# Altium PCB lab2_kochurin_buck.PcbDoc
Units mm, origin at the board's own origin, x right, y up, seen from the top; angles counter-clockwise.
Board outline 72.5 x 29 mm, 2 copper layers (Top Layer, Bottom Layer), stack 1.536 mm thick; 36 components, 20 nets, 122 pads, 276 vias.
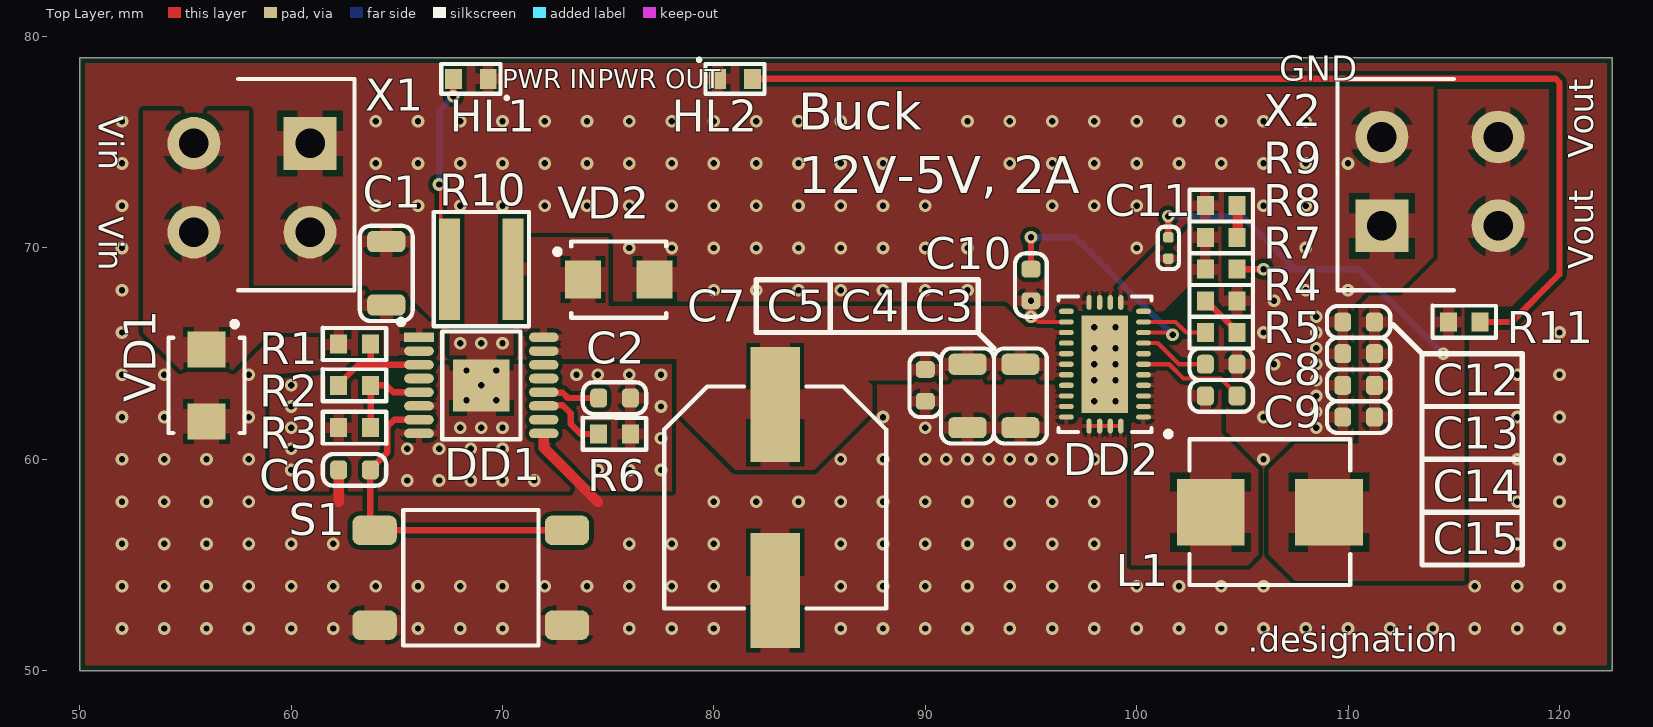
[diagram p0: Top Layer view]
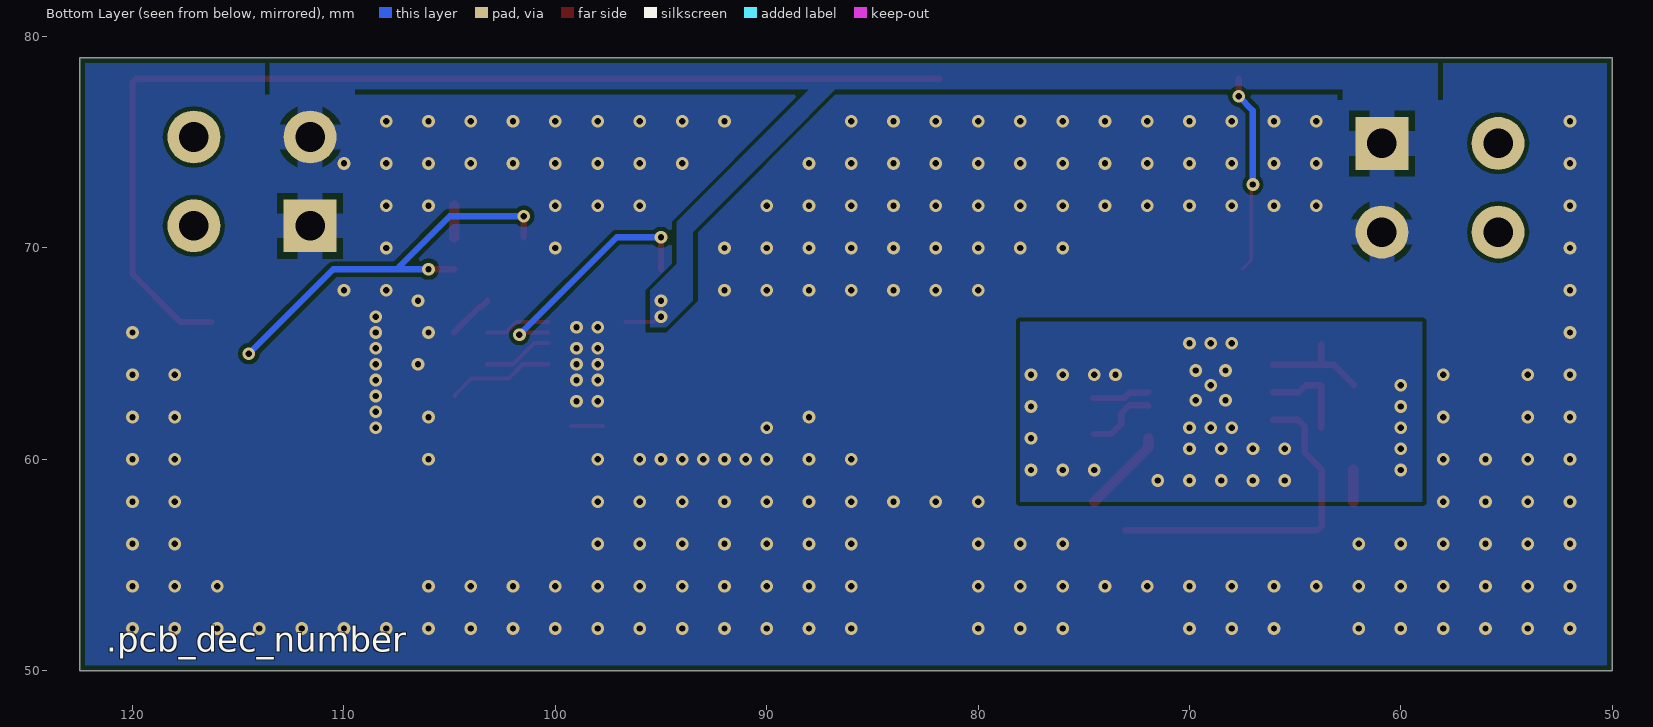
[diagram p1: Bottom Layer view, seen from below]

## Layer stack, top to bottom
Top Solder: solder mask 0.0102, Solder Resist, Dk 3.5
Top Layer: signal copper 0.018
Core 1: core 1.5, FR4, Dk 4.6
Bottom Layer: signal copper 0.018
Bottom Solder: solder mask 0.0102, Solder Resist, Dk 3.5

## Board outline
50,50 122.5,50 122.5,79 50,79

## Design rules (kind name [scope] priority, off if disabled: settings)
AcuteAngle min_acute_angle [OnCopper] p1: minimum=3.50000000000000E+0001 checktracksonly=FALSE // Минимальный угол между примитивами топологии
BoardOutlineClearance board_outline_clearance_std [NOT (OnLayer('Bottom Overlay') OR OnLayer('Top Overlay'))] p1: gap=0.25 ignorepadtopadclearanceinfootprint=FALSE except(0: Arc-SplitContinuation Track-SplitContinuation SMDPad-SplitContinuation THPad-SplitContinuation Via-SplitContinuation Fill-SplitContinuation Poly-SplitContinuation Region-SplitContinuation Text-SplitContinuation) // Отступ элементов топологии от края фрезеруемой печатной платы
Clearance clearance_outer_18um_std [OnTopLayer OR OnBottomLayer] p1: gap=0.125 ignorepadtopadclearanceinfootprint=TRUE except(0.2: Arc-Fill Arc-Poly Track-Fill Track-Poly SMDPad-SMDPad SMDPad-Fill SMDPad-Poly THPad-Fill THPad-Poly Via-Fill Via-Poly Fill-Fill Fill-Poly Poly-Poly Poly-Region Poly-Text; 0.25: Arc-Hole Track-Hole SMDPad-Hole THPad-Hole Via-Hole Fill-Hole Poly-Hole Region-Hole Text-Hole) // Зазоры на внешних слоях
Clearance clearance_inner_18um_std [NOT (OnTopLayer Or OnBottomLayer)] p2: gap=0.125 ignorepadtopadclearanceinfootprint=FALSE except(0.2: Arc-Fill Arc-Poly Track-Fill Track-Poly SMDPad-SMDPad SMDPad-Fill SMDPad-Poly THPad-Fill THPad-Poly Via-Fill Via-Poly Fill-Fill Fill-Poly Poly-Poly Poly-Region Poly-Text; 0.25: Arc-Hole Track-Hole SMDPad-Hole THPad-Hole Via-Hole Fill-Hole Poly-Hole Region-Hole Text-Hole) // Зазоры на внутренних слоях
ComponentClearance [All] p1: gap=0 collisioncheckmode=3 verticalgap=0 showdistances=FALSE
DiffPairsRouting diff_pairs_routing [All] p1: maxlimit=0.127 minlimit=0.127 mostfreqgap=0.127 toplayer_minwidth=0.143 toplayer_maxwidth=0.143 toplayer_prefwidth=0.143 bottomlayer_minwidth=0.143 bottomlayer_maxwidth=0.143 bottomlayer_prefwidth=0.143 impedanceprofiledriven=TRUE impedanceprofileid={FD46899E-B5A2-4EF5-A302-5D2DB6A51F35} maxuncoupledlength=12.7 // Правила трассировки дифференциальных пар
HoleSize min_hole_size_std [IsPad] p1: absolutevalues=TRUE maxlimit=5.9 minlimit=0.6 maxpercent=80.000 minpercent=20.000 // Диаметр межслойного переходного отверстия
HoleSize min_hole_size_via_std [IsVia] p2: absolutevalues=TRUE maxlimit=5.9 minlimit=0.3 maxpercent=80.000 minpercent=20.000 // Минимальный диаметр монтажного отверстия
HoleToHoleClearance hole_to_hole_clearance_std [All] p1: gap=0.2 allowstackedmicrovias=FALSE // Минимальное расстояние между краями двух отверстий
MinimumAnnularRing min_via_ar_std [All] p1: minimumring=0.15 // Поясок площадки переходного отверстия (Annular ring VIA)
MinimumAnnularRing min_pad_ar_std [All] p2: minimumring=0.2 // Поясок монтажной контактной площадки (Annular ring PAD)
MinimumSolderMaskSliver min_solder_mask_bridge_std [All] p1: minsoldermaskwidth=0.15 // Мнимальная ширина масочного мостика
PlaneClearance plane_clearance_18um_std [All] p1: clearance=0.2 // Отступ полигона (для слоя plane) от элементов топологии
PlaneConnect [All] p1: planeconnectstyle=Relief reliefexpansion=0.5 reliefentries=4 reliefconductorwidth=0.2 reliefairgap=0.2
PolygonConnect poly_connect_to_pad<=0.3 [(AsMM(PadXSize_AllLayers)<=0.301) or (AsMM(PadYSize_AllLayers)<=0.301)] p1: thpad.connectstyle=Relief thpad.reliefconductorwidth=0.2 thpad.reliefentries=4 thpad.polygonreliefangle="90 Angle" thpad.airgapwidth=0.2 smdpad.connectstyle=Relief smdpad.reliefconductorwidth=0.2 smdpad.reliefentries=4 smdpad.polygonreliefangle="90 Angle" smdpad.airgapwidth=0.2 via.connectstyle=Direct via.reliefconductorwidth=0.254 via.reliefentries=4 via.polygonreliefangle="90 Angle" via.airgapwidth=0.254 // Правила подключения полигонов для падов от 0,3мм и меньше
PolygonConnect poly_connect_to_pad<=0.4 [(AsMM(PadXSize_AllLayers)<=0.401) or (AsMM(PadYSize_AllLayers)<=0.401)] p2: thpad.connectstyle=Relief thpad.reliefconductorwidth=0.26 thpad.reliefentries=4 thpad.polygonreliefangle="90 Angle" thpad.airgapwidth=0.2 smdpad.connectstyle=Relief smdpad.reliefconductorwidth=0.26 smdpad.reliefentries=4 smdpad.polygonreliefangle="90 Angle" smdpad.airgapwidth=0.2 via.connectstyle=Direct via.reliefconductorwidth=0.254 via.reliefentries=4 via.polygonreliefangle="90 Angle" via.airgapwidth=0.254 // Правила подключения полигонов для падов от 0,4 и меньше
PolygonConnect poly_connect_to_pad<=0.6 [(AsMM(PadXSize_AllLayers)<=0.601) or (AsMM(PadYSize_AllLayers)<=0.601)] p3: thpad.connectstyle=Relief thpad.reliefconductorwidth=0.33 thpad.reliefentries=4 thpad.polygonreliefangle="90 Angle" thpad.airgapwidth=0.2 smdpad.connectstyle=Relief smdpad.reliefconductorwidth=0.33 smdpad.reliefentries=4 smdpad.polygonreliefangle="90 Angle" smdpad.airgapwidth=0.2 via.connectstyle=Direct via.reliefconductorwidth=0.254 via.reliefentries=4 via.polygonreliefangle="90 Angle" via.airgapwidth=0.254 // Правила подключения полигонов для падов от 0,6мм и меньше
PolygonConnect poly_connect_to_pad<=0.7 [(AsMM(PadXSize_AllLayers)<=0.701) or (AsMM(PadYSize_AllLayers)<=0.701)] p4: thpad.connectstyle=Relief thpad.reliefconductorwidth=0.46 thpad.reliefentries=4 thpad.polygonreliefangle="90 Angle" thpad.airgapwidth=0.2 smdpad.connectstyle=Relief smdpad.reliefconductorwidth=0.46 smdpad.reliefentries=4 smdpad.polygonreliefangle="90 Angle" smdpad.airgapwidth=0.2 via.connectstyle=Direct via.reliefconductorwidth=0.254 via.reliefentries=4 via.polygonreliefangle="90 Angle" via.airgapwidth=0.254 // Правила подключения полигонов для падов от 0,7мм и меньше
PolygonConnect poly_connect_to_pad<=0.8 [(AsMM(PadXSize_AllLayers)<=0.8)or(AsMM(PadYSize_AllLayers)<=0.8)] p5: thpad.connectstyle=Relief thpad.reliefconductorwidth=0.53 thpad.reliefentries=4 thpad.polygonreliefangle="90 Angle" thpad.airgapwidth=0.3 smdpad.connectstyle=Relief smdpad.reliefconductorwidth=0.53 smdpad.reliefentries=4 smdpad.polygonreliefangle="90 Angle" smdpad.airgapwidth=0.2 via.connectstyle=Direct via.reliefconductorwidth=0.254 via.reliefentries=4 via.polygonreliefangle="90 Angle" via.airgapwidth=0.254 // Правила подключения полигонов для падов от 0,8мм и меньше
PolygonConnect poly_connect_to_pad<=1 [(AsMM(PadXSize_AllLayers)<=1.01)or(AsMM(PadYSize_AllLayers)<=1.01)] p6: thpad.connectstyle=Relief thpad.reliefconductorwidth=0.6 thpad.reliefentries=4 thpad.polygonreliefangle="90 Angle" thpad.airgapwidth=0.3 smdpad.connectstyle=Relief smdpad.reliefconductorwidth=0.6 smdpad.reliefentries=4 smdpad.polygonreliefangle="90 Angle" smdpad.airgapwidth=0.2 via.connectstyle=Direct via.reliefconductorwidth=0.254 via.reliefentries=4 via.polygonreliefangle="90 Angle" via.airgapwidth=0.254 // Правила подключения полигонов для падов от 1мм и меньше
PolygonConnect poly_connect_to_pad<=1.3 [(AsMM(PadXSize_AllLayers)<=1.31)or(AsMM(PadYSize_AllLayers)<=1.31)] p7: thpad.connectstyle=Relief thpad.reliefconductorwidth=0.66 thpad.reliefentries=4 thpad.polygonreliefangle="90 Angle" thpad.airgapwidth=0.3 smdpad.connectstyle=Relief smdpad.reliefconductorwidth=0.86 smdpad.reliefentries=4 smdpad.polygonreliefangle="90 Angle" smdpad.airgapwidth=0.2 via.connectstyle=Direct via.reliefconductorwidth=0.254 via.reliefentries=4 via.polygonreliefangle="90 Angle" via.airgapwidth=0.254 // Правила подключения полигонов для падов от 1,3мм и меньше
PolygonConnect poly_connect_to_pad<=1.6 [(AsMM(PadXSize_AllLayers)<=1.61)or(AsMM(PadYSize_AllLayers)<=1.61)] p8: thpad.connectstyle=Relief thpad.reliefconductorwidth=0.8 thpad.reliefentries=4 thpad.polygonreliefangle="90 Angle" thpad.airgapwidth=0.3 smdpad.connectstyle=Relief smdpad.reliefconductorwidth=1 smdpad.reliefentries=4 smdpad.polygonreliefangle="90 Angle" smdpad.airgapwidth=0.2 via.connectstyle=Direct via.reliefconductorwidth=0.254 via.reliefentries=4 via.polygonreliefangle="90 Angle" via.airgapwidth=0.254 // Правила подключения полигонов для падов от 1,6мм и меньше
PolygonConnect poly_connect_to_pad<=1.8 [(AsMM(PadXSize_AllLayers)<=1.8)or(AsMM(PadYSize_AllLayers)<=1.8)] p9: thpad.connectstyle=Relief thpad.reliefconductorwidth=1 thpad.reliefentries=4 thpad.polygonreliefangle="90 Angle" thpad.airgapwidth=0.3 smdpad.connectstyle=Relief smdpad.reliefconductorwidth=1.2 smdpad.reliefentries=4 smdpad.polygonreliefangle="90 Angle" smdpad.airgapwidth=0.2 via.connectstyle=Direct via.reliefconductorwidth=0.254 via.reliefentries=4 via.polygonreliefangle="90 Angle" via.airgapwidth=0.254 // Правила подключения полигонов для падов от 1,8мм и меньше
PolygonConnect poly_connect_to_pad<=2 [(AsMM(PadXSize_AllLayers)<=2.01)or(AsMM(PadYSize_AllLayers)<=2.01)] p10: thpad.connectstyle=Relief thpad.reliefconductorwidth=1.1 thpad.reliefentries=4 thpad.polygonreliefangle="90 Angle" thpad.airgapwidth=0.3 smdpad.connectstyle=Relief smdpad.reliefconductorwidth=1.4 smdpad.reliefentries=4 smdpad.polygonreliefangle="90 Angle" smdpad.airgapwidth=0.2 via.connectstyle=Direct via.reliefconductorwidth=0.254 via.reliefentries=4 via.polygonreliefangle="90 Angle" via.airgapwidth=0.254 // Правила подключения полигонов для падов от 2мм и меньше
PolygonConnect poly_connect_to_pad<=2.3 [(AsMM(PadXSize_AllLayers)<=2.31)or(AsMM(PadYSize_AllLayers)<=2.31)] p11: thpad.connectstyle=Relief thpad.reliefconductorwidth=1.2 thpad.reliefentries=4 thpad.polygonreliefangle="90 Angle" thpad.airgapwidth=0.3 smdpad.connectstyle=Relief smdpad.reliefconductorwidth=1.4 smdpad.reliefentries=4 smdpad.polygonreliefangle="90 Angle" smdpad.airgapwidth=0.2 via.connectstyle=Direct via.reliefconductorwidth=0.254 via.reliefentries=4 via.polygonreliefangle="90 Angle" via.airgapwidth=0.254 // Правила подключения полигонов для падов от 2,3мм и меньше
PolygonConnect poly_connect_to_pad<=2.5 [(AsMM(PadXSize_AllLayers)<=2.51)or(AsMM(PadYSize_AllLayers)<=2.51)] p12: thpad.connectstyle=Relief thpad.reliefconductorwidth=1.2 thpad.reliefentries=4 thpad.polygonreliefangle="90 Angle" thpad.airgapwidth=0.3 smdpad.connectstyle=Relief smdpad.reliefconductorwidth=1.4 smdpad.reliefentries=4 smdpad.polygonreliefangle="90 Angle" smdpad.airgapwidth=0.2 via.connectstyle=Direct via.reliefconductorwidth=0.254 via.reliefentries=4 via.polygonreliefangle="90 Angle" via.airgapwidth=0.254 // Правила подключения полигонов для падов от 2,5мм и меньше
PolygonConnect poly_connect_to_pad<=2.7 [(AsMM(PadXSize_AllLayers)<=2.71)or(AsMM(PadYSize_AllLayers)<=2.71)] p13: thpad.connectstyle=Relief thpad.reliefconductorwidth=1.4 thpad.reliefentries=4 thpad.polygonreliefangle="90 Angle" thpad.airgapwidth=0.3 smdpad.connectstyle=Relief smdpad.reliefconductorwidth=1.6 smdpad.reliefentries=4 smdpad.polygonreliefangle="90 Angle" smdpad.airgapwidth=0.2 via.connectstyle=Direct via.reliefconductorwidth=0.254 via.reliefentries=4 via.polygonreliefangle="90 Angle" via.airgapwidth=0.254 // Правила подключения полигонов для падов от 2,7мм и меньше
PolygonConnect poly_connect_to_pad<=3 [(AsMM(PadXSize_AllLayers)<=3.01)or(AsMM(PadYSize_AllLayers)<=3.01)] p14: thpad.connectstyle=Relief thpad.reliefconductorwidth=1.6 thpad.reliefentries=4 thpad.polygonreliefangle="90 Angle" thpad.airgapwidth=0.3 smdpad.connectstyle=Relief smdpad.reliefconductorwidth=1.8 smdpad.reliefentries=4 smdpad.polygonreliefangle="90 Angle" smdpad.airgapwidth=0.2 via.connectstyle=Direct via.reliefconductorwidth=0.254 via.reliefentries=4 via.polygonreliefangle="90 Angle" via.airgapwidth=0.254 // Правила подключения полигонов для падов от 3мм и меньше
PolygonConnect poly_connect_to_pad<=7 [(AsMM(PadXSize_AllLayers)<7.01)or(AsMM(PadYSize_AllLayers)<=7.01)] p15: thpad.connectstyle=Relief thpad.reliefconductorwidth=2 thpad.reliefentries=4 thpad.polygonreliefangle="90 Angle" thpad.airgapwidth=0.4 smdpad.connectstyle=Relief smdpad.reliefconductorwidth=2 smdpad.reliefentries=4 smdpad.polygonreliefangle="90 Angle" smdpad.airgapwidth=0.3 via.connectstyle=Direct via.reliefconductorwidth=0.254 via.reliefentries=4 via.polygonreliefangle="90 Angle" via.airgapwidth=0.254 // Правила подключения полигонов для падов от 7мм и меньше
PolygonConnect poly_connect_to_pad [All] p16: thpad.connectstyle=Relief thpad.reliefconductorwidth=0.25 thpad.reliefentries=4 thpad.polygonreliefangle="90 Angle" thpad.airgapwidth=0.2 smdpad.connectstyle=Relief smdpad.reliefconductorwidth=0.25 smdpad.reliefentries=4 smdpad.polygonreliefangle="90 Angle" smdpad.airgapwidth=0.2 via.connectstyle=Direct via.reliefconductorwidth=0.25 via.reliefentries=4 via.polygonreliefangle="90 Angle" via.airgapwidth=0.2 // Правила подключения полигонов общие
RoutingCorners [All] p1 off: cornerstyle=45-Degree minsetback=2.5 maxsetback=2.5
RoutingVias [All] p1: holewidth=0.3 width=0.6 viastyle="Through Hole" minholewidth=0.3 minwidth=0.6 maxholewidth=5.9 maxwidth=6.4
SilkToSilkClearance silk_to_silk_clearance_std [All] p1 off: silktosilkclearance=0.15 // Отступ текста шелкографии от других примитивов шелкографии
SilkToSolderMaskClearance silk_to_solder_mask_clearance_std [IsPad] p1 off: minsilkscreentomaskgap=0.15 clearancetoexposedcopper=FALSE // Минимальное расстояние между элементами шелкографии и вскрытой медью
SolderMaskExpansion solder_mask_expansion_std [All] p1: expansion=0.05 // Припуск паяльной масски
UnRoutedNet [All] p1: checkbadconnections=TRUE
Width width_18um_std [All] p1: maxlimit=10 minlimit=0.125 preferedwidth=0.15 checkconnectedcopper=TRUE // Ширина проводников (общая)
19 further rules are at their usual default settings.

## Components (designator, comment, footprint, x,y, rotation, side; value= is the part's Value field where it differs from the comment)
C1 "1 мк" C1206 64.5,68.8 r90 top
C2 "82" C0603 75.3,62.9 r0 top
C3 "2,2 мк" C1206 94.5,63 r270 top
C4 "2,2 мк" C1206 92,63 r270 top
C5 "0,1 мк" C0603 90,63.5 r270 top
C6 "0,1 мк" C0603 63,59.5 r180 top
C7 "47 мк" CAPAE-1000X1000X1200 82.9,58.2 r270 top
C8 "2,2 мк" C0603 104,64.5 r0 top
C9 "0,47 мк" C0603 104,63 r0 top
C10 "1 мк" C0603 95,68.25 r270 top
C11 "27 п" C0402 101.5,70 r270 top
C12 "47 мк" C0603 110.5,66.5 r0 top
C13 "47 мк" C0603 110.5,65 r0 top
C14 "47 мк" C0603 110.5,63.5 r0 top
C15 "47 мк" C0603 110.5,62 r0 top
DD1 "TPS26600PWPR" HTSSOP-16 69,63.5 r0 top
DD2 "LM76002QRNPRQ1" WQFN-30 98.5,64.5 r180 top
HL1 "TLMG1100-GS08" HL0603 68.5,78 r180 top
HL2 "TLMS1000-GS08" HL0603 81,78 r0 top
L1 "SRP7028A-220M" SRP-2-670X660X280 106.3,57.5 r0 top
R1 "523 к" R0603 63,65.45 r180 top
R2 "26,7 к" R0603 63,63.5 r180 top
R3 "44,2 к" R0603 63,61.5 r0 top
R4 "4,42 к" R0603 104,67.5 r180 top
R5 "130 к" R0603 104,66 r180 top
R6 "6,04 к" R0603 75.3,61.2 r180 top
R7 "100 к" R0603 104,69 r0 top
R8 "24 к" R0603 104,70.5 r180 top
R9 "1 к" R0603 104,72 r0 top
R10 "1 к" R1218 69,69 r0 top
R11 "220" R0603 115.5,66.5 r180 top
S1 "FSM4JSMA" FSM4JSMA 68.5,54.4 r0 top
VD1 "1.5SMC62CA" DO-214AB 56,63.5 r270 top
VD2 "SL13-E3/5AT" DO-214AC 75.5,68.5 r0 top
X1 "4-1775099-0" 4-1775099-0 57.5,73 r270 top
X2 "4-1775099-0" 4-1775099-0 115,73 r90 top

## Footprints (in the part's own frame and the unit in brackets; to place one, negate y for a bottom-side part, rotate by r counter-clockwise, add the part's x,y. Pads: shape width x height; smd on the part's side, far side on the other; paste and mask are expansions set on the pad)
4-1775099-0 [mm]
  rect 2.5x2.5 hole 1.4: 1(-1.95,3.4)
  round 2.5 hole 1.4: 2(2.25,3.4) 3(-1.95,-2.1) 4(2.25,-2.1)
  silkscreen extent -5,0 5,5.5, body extent -4.95,-5.45 4.9,5.45, height 12.8
C0402 [mm] "Chip Capacitor, 2-Leads, Body 1,00x0,50mm, IPC Medium Density"
  rrect50% 0.5x0.5 smd: 1(-0.5,0) 2(0.5,0)
  silkscreen extent -1,-0.5 1,0.5, body extent -0.5,-0.25 0.5,0.25, height 0.5
C0603 [mm] "Chip Capacitor, 2-Leads, Body 1,60x0,80mm, IPC Medium Density"
  rrect50% 0.8x0.9 smd: 1(-0.75,0) 2(0.75,0)
  silkscreen extent -1.5,-0.75 1.5,0.75, body extent -0.8,-0.4 0.8,0.4, height 0.8
C1206 [mm] "Chip Capacitor, 2-Leads, Body 3,20x1,60mm, IPC Medium Density"
  rrect50% 1x1.8 smd: 1(-1.5,0) 2(1.5,0)
  silkscreen extent -2.25,-1.25 2.25,1.25, body extent -1.6,-0.8 1.6,0.8, height 0.78
CAPAE-1000X1000X1200 [mm] "Aluminum Electrolytic Capacitor, Body 10,50x10,50x12,50mm, IPC Low Density"
  rect 5.45x2.35 smd: 1(-4.4,0) 2(4.4,0)
  silkscreen extent -5.25,-5.25 5.25,5.25, body extent -6.05,-5.25 6.05,5.25, height 12.5
DO-214AB [mm] "Molded Diode, 2-Leads, Body 6,86x5,91mm, IPC Medium Density"
  rect 1.7x1.8 smd: 1(-1.7,0) 2(1.7,0)
  silkscreen extent -3.02,-1.8 2.25,1.8, body extent -2.7,-1.81 2.7,1.81, height 2.43
DO-214AC [mm] "Molded Diode, 2-Leads, Body 4,25x2,67mm, IPC Medium Density"
  rect 1.7x1.8 smd: 1(-1.7,0) 2(1.7,0)
  silkscreen extent -3.02,-1.8 2.25,1.8, body extent -2.7,-1.81 2.7,1.81, height 2.43
FSM4JSMA [mm]
  rrect50% 2.1x1.4 smd: 1(-4.55,2.24) 1(4.55,2.24) 2(-4.55,-2.24) 2(4.55,-2.24)
  silkscreen extent -3.2,-3.2 3.2,3.2, body extent -5,-3 5,3, height 5.13
HL0603 [mm] "Chip Diode, 2-Leads, Body 1,60x0,80mm, IPC Medium Density"
  rect 0.8x0.95 smd: 1(-0.825,0) 2(0.825,0)
  silkscreen extent -1.75,-0.7 1.4,0.95, body extent -0.81,-0.4 0.81,0.4, height 0.6
HTSSOP-16 [mm] "TSOP, 16-Leads, Body 5,00x4,40mm, Pitch 0,65mm, Thermal Pad 2,46x2,66mm, IPC Medium Density"
  rect 2.66x2.46 smd: 0(0,0)
  rect 1.4x0.45 smd: 1(-2.95,2.275)
  oval 1.4x0.45 smd: 2(-2.95,1.625) 3(-2.95,0.975) 4(-2.95,0.325) 5(-2.95,-0.325) 6(-2.95,-0.975) 7(-2.95,-1.625) 8(-2.95,-2.275) 9(2.95,-2.275) 10(2.95,-1.625) 11(2.95,-0.975) 12(2.95,-0.325) 13(2.95,0.325) 14(2.95,0.975) 15(2.95,1.625) 16(2.95,2.275)
  silkscreen extent -3.92,-2.55 1.85,3.12, body extent -3.2,-2.5 3.2,2.5, height 1.2
R0603 [mm] "Chip Resistor, 2-Leads, Body 1,60x0,80mm, IPC Medium Density"
  rect 0.8x0.9 smd: 1(-0.75,0) 2(0.75,0)
  silkscreen extent -1.5,-0.77 1.5,0.75, body extent -0.77,-0.43 0.78,0.43, height 0.43
R1218 [mm] "Chip Resistor, 2-Leads, Body 4,60x3,10mm, IPC Medium Density"
  rect 1x4.8 smd: 1(-1.5,0) 2(1.5,0)
  silkscreen extent -2.25,-2.7 2.25,2.7, body extent -1.6,-2.3 1.6,2.31, height 0.55
SRP-2-670X660X280 [mm] "Precision Wire Wound Inductor, 2-Leads, Body 7,30x6,60mm, IPC Medium Density"
  rect 3.2x3.15 smd: 1(-2.8,0) 2(2.8,0)
  silkscreen extent -3.8,-3.45 3.8,3.45, body extent -3.7,-3.3 3.7,3.3, height 3
WQFN-30 [mm] "QFN, 30-Leads, Body 4,00x6,00mm, Pitch 0,50mm, Thermal Pad 2,20x4,60mm, IPC Medium Density"
  rect 2.2x4.6 smd: 0(0,0)
  oval 0.7x0.25 smd: 1(-1.825,2.5) 2(-1.825,2) 3(-1.825,1.5) 4(-1.825,1) 5(-1.825,0.5) 6(-1.825,0) 7(-1.825,-0.5) 8(-1.825,-1) 9(-1.825,-1.5) 10(-1.825,-2) 11(-1.825,-2.5) 16(1.825,-2.5) 17(1.825,-2) 18(1.825,-1.5) 19(1.825,-1) 20(1.825,-0.5) 21(1.825,0) 22(1.825,0.5) 23(1.825,1) 24(1.825,1.5) 25(1.825,2) 26(1.825,2.5)
  oval 0.25x0.7 smd: 12(-0.75,-2.925) 13(-0.25,-2.925) 14(0.25,-2.925) 15(0.75,-2.925) 27(0.75,2.925) 28(0.25,2.925) 29(-0.25,2.925) 30(-0.75,2.925)
  silkscreen extent -3.13,-3.2 2.2,3.42, body extent -2,-3 2,3, height 0.8

## Part data
C1: library part c0066, "=Описание", HelpURL=https://www.yageo.com/upload/media/product/productsearch/datasheet/mlcc/UPY-NP0X7R_MV_100-to-630V_22.pdf, ID=c0066, Корпус=1206, Наименование=CC1206KKX7R0BB105, Напряжение="100 В", Номинал="1 мк", Номинальное напряжение="100 В", Описание="Конденсатор чип 1206 1 мкФ 100 В ±10 %", Отклонение="±10 %", Производитель="YAGEO Corp.", Рабочие температуры="от –55 °С до +125 °С", Температурный коэффициент емкости=X7R, Фамилия=Ларионов
C2: library part c0011, "=Описание", HelpURL=https://www.yageo.com/upload/media/product/productsearch/datasheet/mlcc/UPY-GP_NP0_16V-to-50V_18.pdf, ID=c0011, Корпус=0603, Наименование=CC0603JRNPO7BN820, Напряжение="16 В", Номинал=82, Номинальное напряжение="16 В", Описание="Конденсатор чип 0603 82 пФ 16 В ±5 %", Отклонение="±5 %", Производитель="YAGEO Corp.", Рабочие температуры="от –55 °С до +125 °С", Температурный коэффициент емкости=C0G, Фамилия=Ларионов
C3 C4: library part c0076, "=Описание", HelpURL=https://www.yageo.com/upload/media/product/productsearch/datasheet/mlcc/UPY-NP0X7R_MV_100-to-630V_22.pdf, ID=c0076, Корпус=1206, Наименование=CC1206KKX7R0BB225, Напряжение="100 В", Номинал="2,2 мк", Номинальное напряжение="100 В", Описание="Конденсатор чип 1206 2,2 мкФ 100 В ±10 %", Отклонение="±10 %", Производитель="YAGEO Corp.", Рабочие температуры="от –55 °С до +125 °С", Температурный коэффициент емкости=X7R, Фамилия=Ларионов
C5 C6: library part c0036, "=Описание", HelpURL=https://www.yageo.com/upload/media/product/productsearch/datasheet/mlcc/UPY-NP0X7R_MV_100-to-630V_22.pdf, ID=c0036, Корпус=0603, Наименование=CC0603KRX7R0BB104, Напряжение="100 В", Номинал="0,1 мк", Номинальное напряжение="100 В", Описание="Конденсатор чип 0603 100 нФ 100 В ±10 %", Отклонение="±10 %", Производитель="YAGEO Corp.", Рабочие температуры="от –55 °С до +125 °С", Температурный коэффициент емкости=X7R, Фамилия=Ларионов
C7: library part c0118, "=Описание", HelpURL=https://www.vishay.com/capacitors/list/product-28403/, ID=c0118, Корпус="CAPAE (10 x 10 x 12)", Наименование=MAL214699904E3, Напряжение="100 В", Номинал="47 мк", Номинальное напряжение="100 В", Описание="Конденсатор электролитический 47 мкФ 100 В ±20 %", Отклонение="±20 %", Производитель="Vishay Intertechnology, Inc.", Рабочие температуры="от –55 °С до +125 °С", Температурный коэффициент емкости=-, Фамилия=Ларионов
C8: library part c0025, "=Описание", HelpURL=https://www.yageo.com/upload/media/product/productsearch/datasheet/mlcc/UPY-GPHC_X7R_6.3V-to-50V_20.pdf, ID=c0025, Корпус=0603, Наименование=CC0603KRX7R6BB225, Напряжение="10 В", Номинал="2,2 мк", Номинальное напряжение="10 В", Описание="Конденсатор чип 0603 2,2 мкФ 10 В ±10 %", Отклонение="±10 %", Производитель="YAGEO Corp.", Рабочие температуры="от -55 °С до +125 °С", Фамилия=Чернов
C9: library part c0007, "=Описание", HelpURL=http://product.samsungsem.com/mlcc/CL10B474KO8VPN.do, ID=c0007, Корпус=0603, Наименование=CL10B474KO8VPNC, Напряжение="16 В", Номинал="0,47 мк", Номинальное напряжение="16 В", Описание="Конденсатор чип 0603 0,47 мкФ 16 В ±10 %", Отклонение="±10 %", Производитель="Samsung electro-mechanics", Рабочие температуры="от -55 °С до +125 °С", Фамилия=Водорезов
C10: library part c0022, "=Описание", HelpURL=https://www.yageo.com/upload/media/product/products/datasheet/mlcc/UPY-GPHC_X7R_6.3V-to-50V_20.pdf, ID=c0022, Корпус=0603, Наименование=CC0603KRX7R8BB105, Напряжение="25 В", Номинал="1 мк", Номинальное напряжение="25 В", Описание="Конденсатор чип 0603 1 мкФ 25 В ±10 %", Отклонение="±10 %", Производитель="YAGEO Corp.", Рабочие температуры="от -55 °С до +125 °С", Фамилия=Ларионов
C11: library part c0001, "=Описание", HelpURL=http://product.samsungsem.com/mlcc/CL05C270JB5NNN.do, ID=c0001, Корпус=0402, Наименование=CL05C270JB5NNNC, Напряжение="50 В", Номинал="27 п", Номинальное напряжение="50 В", Описание="Конденсатор чип 0402 27 пФ 50 В ±5 %", Отклонение="±5 %", Производитель="Samsung electro-mechanics", Рабочие температуры="от -55 °С до +125 °С", Фамилия=Соколов
C12 C13 C14 C15: library part c0035, "=Описание", HelpURL=https://www.yageo.com/upload/media/product/productsearch/datasheet/mlcc/UPY-GPHC_X5R_4V-to-50V_26.pdf, ID=c0035, Корпус=0603, Наименование=CC0603MRX5R5BB476, Напряжение="6,3 В", Номинал="47 мк", Номинальное напряжение="6,3 В", Описание="Конденсатор чип 0603 47 мкФ 6,3 В ±20 %", Отклонение="±20 %", Производитель="YAGEO Corp.", Рабочие температуры="от -55 °С до +85 °С", Фамилия=Жернаков
DD1: library part dd0001, "=Описание", HelpURL=https://www.ti.com/product/TPS2660, ID=dd0001, Корпус=HTSSOP-16, Максимальное напряжение="62 В", Наименование=TPS26600PWPR, Напряжение="от 4,2 В до 60 В", Описание="Защитная микросхема eFuse 60 В и 2 А", Производитель="Texas Instruments", Рабочие температуры="от -40 °С до +125 °С", Ток="от 0,1 А до 2,23 А", Фамилия=Ларионов
DD2: library part dd0007, "=Описание", HelpURL=https://www.ti.com/product/LM76002-Q1, ID=dd0007, Входное напряжение="от 3,5 В до 60 В", Выходное напряжение="от 1 В до 57 В", Коммутируемый ток="от 0 А до 2,5 А", Корпус=WQFN-30, Наименование=LM76002QRNPRQ1, Описание="Понижающий преобразователь напряжения 60 В и 2,5 А", Производитель="Texas Instruments", Рабочие температуры="от -40 °С до +125 °С", Фамилия=Кочурин, Частота переключения="от 300 кГц до 2,2 МГц"
HL1: library part hl0005, "=Описание", HelpURL=https://www.vishay.com/leds/list/product-83173/, ID=hl0005, Корпус=0603, Наименование=TLMG1100-GS08, Номинальная длина волны="570 нм", Номинальная сила света="35 мкд", Номинальное падение напряжения="2,1 В", Номинальный прямой ток="30 мА", Описание="Светодиод чип 0603 зеленый", Производитель="Vishay Intertechnology, Inc.", Рабочие температуры="от -40 °С до +100 °С", Рассеиваемая мощность="90 мВт", Фамилия=Ларионов, Цвет=Green
HL2: library part hl0001, "=Описание", HelpURL=https://www.vishay.com/leds/list/product-83172/, ID=hl0001, Корпус=0603, Наименование=TLMS1000-GS08, Номинальная длина волны="628 нм", Номинальная сила света="4 мкд", Номинальное падение напряжения="1,8 В", Номинальный прямой ток="15 мА", Описание="Светодиод чип 0603 красный", Производитель="Vishay Intertechnology, Inc.", Рабочие температуры="от -40 °С до +100 °С", Рассеиваемая мощность="40 мВт", Фамилия=Ларионов, Цвет=Red
L1: library part l0006, "=Описание", HelpURL=https://www.bourns.com/products/magnetic-products/power-inductors-aec-q200-compliant/product/SRP7028A, ID=l0006, Индуктивность="22 мкГн", Корпус="6,7 x 6,6 x 2,8", Максимальное активное сопротивление="190 мОм", Наименование=SRP7028A-220M, Номинал="22 мкГн", Номинальное активное сопротивление="165 мОм", Номинальный ток (при нагреве на 20 °С/40 °С)="2 А", Описание="Катушка индуктивности 22 мкГн ±20 %", Отклонение="±20 %", Производитель="Bourns, Inc.", Рабочее напряжение="не указано", Рабочие температуры="от –55 °С до +150 °С", Резонансная частота="10 МГц", Ток насыщения="3,5 А", Фамилия=Ларионов
R1: library part r0119, "=Описание", HelpURL=https://www.yageo.com/upload/media/product/productsearch/datasheet/rchip/PYu-RC_Group_51_RoHS_L_11.pdf, ID=r0119, Корпус=0603, Наименование=RC0603FR-07523KL, Номинал="523 к", Номинальное напряжение="75 В", Номинальный ток="1 А", Описание="Резистор чип 0603 523 кОм ±1 % 0,1 Вт", Отклонение="±1 %", Производитель="YAGEO Corp.", Рабочие температуры="от –55 °С до +155 °С", Фамилия=Жернаков
R2: library part r0022, "=Описание", HelpURL=https://www.yageo.com/upload/media/product/productsearch/datasheet/rchip/PYu-RC_Group_51_RoHS_L_11.pdf, ID=r0022, Корпус=0603, Наименование=RC0603FR-0726K7L, Номинал="26,7 к", Номинальное напряжение="75 В", Номинальный ток="1 А", Описание="Резистор чип 0603 26,7 кОм ±1 % 0,1 Вт", Отклонение="±1 %", Производитель="YAGEO Corp.", Рабочие температуры="от -55 °С до +155 °С", Фамилия=Ларионов
R3: library part r0023, "=Описание", HelpURL=https://www.yageo.com/upload/media/product/productsearch/datasheet/rchip/PYu-RC_Group_51_RoHS_L_11.pdf, ID=r0023, Корпус=0603, Наименование=RC0603FR-0744K2L, Номинал="44,2 к", Номинальное напряжение="75 В", Номинальный ток="1 А", Описание="Резистор чип 0603 44,2 кОм ±1 % 0,1 Вт", Отклонение="±1 %", Производитель="YAGEO Corp.", Рабочие температуры="от -55 °С до +155 °С", Фамилия=Ларионов
R4: library part r0028, "=Описание", HelpURL=https://www.yageo.com/upload/media/product/productsearch/datasheet/rchip/PYu-RC_Group_51_RoHS_L_11.pdf, ID=r0028, Корпус=0603, Наименование=RC0603FR-074K42L, Номинал="4,42 к", Номинальное напряжение="75 В", Номинальный ток="1 А", Описание="Резистор чип 0603 4,42 кОм ±1 % 0,1 Вт", Отклонение="±1 %", Производитель="YAGEO Corp.", Рабочие температуры="от -55 °С до +155 °С", Фамилия=Жернаков
R5: library part r0077, "=Описание", HelpURL=https://www.yageo.com/upload/media/product/productsearch/datasheet/rchip/PYu-RC_Group_51_RoHS_L_11.pdf, ID=r0077, Корпус=0603, Наименование=RC0603FR-07130KL, Номинал="130 к", Номинальное напряжение="75 В", Номинальный ток="1 А", Описание="Резистор чип 0603 130 кОм ±1 % 0,1 Вт", Отклонение="±1 %", Производитель="YAGEO Corp.", Рабочие температуры="от -55 °С до +155 °С", Фамилия=Паньков
R6: library part r0015, "=Описание", HelpURL=https://www.yageo.com/upload/media/product/productsearch/datasheet/rchip/PYu-RC_Group_51_RoHS_L_11.pdf, ID=r0015, Корпус=0603, Наименование=RC0603FR-076K04L, Номинал="6,04 к", Номинальное напряжение="75 В", Номинальный ток="1 А", Описание="Резистор чип 0603 6,04 кОм ±1 % 0,1 Вт", Отклонение="±1 %", Производитель="YAGEO Corp.", Рабочие температуры="от -55 °С до +155 °С", Фамилия=Ларионов
R7: library part r0073, "=Описание", HelpURL=https://www.yageo.com/upload/media/product/productsearch/datasheet/rchip/PYu-RC_Group_51_RoHS_L_11.pdf, ID=r0073, Корпус=0603, Наименование=RC0603FR-07100KL, Номинал="100 к", Номинальное напряжение="75 В", Номинальный ток="1 А", Описание="Резистор чип 0603 100 кОм ±1 % 0,1 Вт", Отклонение="±1 %", Производитель="YAGEO Corp.", Рабочие температуры="от -55 °С до +155 °С", Фамилия=Водорезов
R8: library part r0052, "=Описание", HelpURL=https://www.yageo.com/upload/media/product/productsearch/datasheet/rchip/PYu-RC_Group_51_RoHS_L_11.pdf, ID=r0052, Корпус=0603, Наименование=RC0603FR-0724KL, Номинал="24 к", Номинальное напряжение="75 В", Номинальный ток="1 А", Описание="Резистор чип 0603 24 кОм ±1 % 0,1 Вт", Отклонение="±1 %", Производитель="YAGEO Corp.", Рабочие температуры="от -55 °С до +155 °С", Фамилия=Паньков
R9: library part r0012, "=Описание", HelpURL=https://www.yageo.com/upload/media/product/productsearch/datasheet/rchip/PYu-RC_Group_51_RoHS_L_11.pdf, ID=r0012, Корпус=0603, Наименование=RC0603FR-071KL, Номинал="1 к", Номинальное напряжение="75 В", Номинальный ток="1 А", Описание="Резистор чип 0603 1 кОм ±1 % 0,1 Вт", Отклонение="±1 %", Производитель="YAGEO Corp.", Рабочие температуры="от -55 °С до +155 °С", Фамилия=Ларионов
R10: library part r0032, "=Описание", HelpURL=https://www.yageo.com/upload/media/product/productsearch/datasheet/rchip/PYu-AA_51_RoHS_L_3.pdf, ID=r0032, Корпус=1218, Наименование=AA1218FK-071KL, Номинал="1 к", Номинальное напряжение="200 В", Номинальный ток="6 А", Описание="Резистор чип 1218 1 кОм ±1 % 1 Вт", Отклонение="±1 %", Производитель="YAGEO Corp.", Рабочие температуры="от –55 °С до +155 °С", Фамилия=Ларионов
R11: library part r0009, "=Описание", HelpURL=https://www.yageo.com/upload/media/product/productsearch/datasheet/rchip/PYu-RC_Group_51_RoHS_L_11.pdf, ID=r0009, Корпус=0603, Наименование=RC0603FR-07220RL, Номинал=220, Номинальное напряжение="75 В", Номинальный ток="1 А", Описание="Резистор чип 0603 220 Ом ±1 % 0,1 Вт", Отклонение="±1 %", Производитель="YAGEO Corp.", Рабочие температуры="от -55 °С до +155 °С", Фамилия=Ларионов
S1: library part sw0001, "=Описание", HelpURL=https://www.te.com/usa-en/product-4-1437565-1.html, ID=sw0001, Количество контактов=4, Корпус=6,00x6,00x4,98, Наименование=FSM4JSMA, Описание="Тактовая кнопка поверхностного монтажа", Производитель="TE Connectivity", Промывка=Разрешена, Рабочие температуры="от –35 °С до +85 °С", Сопротивление контакта="100 мОм", Ток нагрузки="50 мА @ 24 В", Фамилия=Паньков
VD1: library part vd0004, "=Описание", HelpURL=https://www.littelfuse.com/products/tvs-diodes/surface-mount/1_5smc.aspx, ID=vd0004, Корпус=DO-214AB, Наименование=1.5SMC62CA, Описание="Двунаправленная диодная сборка для подавления помех, 53 В", Производитель="Littelfuse, Inc.", Фамилия=Ларионов
VD2: library part vd0002, "=Описание", HelpURL=https://www.vishay.com/product?docid=88740, ID=vd0002, Импульсное обратное напряжение="30 В", Корпус=DO-214AC, Макс допустимый средний прямой ток="1,5 А", Наименование=SL13-E3/5AT, Описание="Диод Шоттки 30 В 1,5 А", Пиковое прямое напряжение="0,445 В", Производитель="Vishay Intertechnology, Inc.", Рабочие температуры="от –55 °С до +125 °С", Фамилия=Ларионов
X1 X2: library part x0004, "=Описание", Contact_1=GND, Contact_2=GND, HelpURL=https://www.te.com/usa-en/product-4-1775099-0.html, ID=x0004, Наименование=4-1775099-0, Описание="ATX Power 4 pin гнездо прямой", Производитель="TE Connectivity", Фамилия=Ларионов
  X1: Contact_3=+12В, Contact_4=+12В
  X2: Contact_3=+5В, Contact_4=+5В

## Via types
v1: diameter 0.6/0.6 (per signal layer), hole 0.3, Top Layer to Bottom Layer, tented both sides, 276 vias

## Nets (pads, with @x,y where several pads share a name; then routed paths per layer and width w, separated by ;. In a path a pad name is that pad's centre, name@x,y a point inside that pad or via, vN(x,y) a via of type N, cw(c..) or ccw(c..) an arc to the next point about the centre after c; other vN are vias at no path point)
dVdT: C2.1 DD1.12 | length 2.7
  Top Layer w0.3: DD1.12 71.979,63.146 72.854,63.146 73.1,62.9 C2.1
FB: C11.2 DD2.12 R7.1 R8.2
GND: C1.2 C3.2 C4.2 C5.2 C6.2 C7.2 C8.2 C10.2 C12.1 C13.1 C14.1 C15.1 DD1.9 DD2.0 DD2.13 DD2.14 DD2.15 DD2.17 DD2.24 DD2.25 DD2.26 DD2.27 DD2.28 DD2.29 DD2.30 HL1.1 HL2.1 R4.1 R9.1 S1.2 VD1.2 VD2.2 X1.1 X1.2 X2.1 X2.2 | length 9.7
  Top Layer w0.2: v1(95,67.5) v1(95,66.75) 95.108,66.75 95.358,66.5 DD2.17 ; DD2.27 DD2.28 DD2.30
  Top Layer w0.5: 62.25,58 C6.2 ; DD1.9@71.95,61 71.95,60.55 74.5,58
  Bottom Layer w1: X2.2@111.5,75.15 X2.2
  other v1: 52,52 54,52 56,52 58,52 60,52 62,52 66,52 68,52 70,52 76,52 78,52 80,52 86,52 88,52 90,52 92,52 94,52 96,52 98,52 100,52 102,52 104,52 106,52 108,52 110,52 112,52 114,52 116,52 118,52 120,52 52,54 54,54 56,54 58,54 60,54 62,54 64,54 66,54 68,54 70,54 72,54 74,54 76,54 78,54 80,54 86,54 88,54 90,54 92,54 94,54 96,54 98,54 100,54 102,54 104,54 106,54 116,54 118,54 120,54 52,56 54,56 56,56 58,56 60,56 62,56 76,56 78,56 80,56 86,56 88,56 90,56 92,56 94,56 96,56 98,56 118,56 120,56 52,58 54,58 56,58 58,58 80,58 82,58 84,58 86,58 88,58 90,58 92,58 94,58 96,58 98,58 118,58 120,58 52,60 54,60 56,60 58,60 86,60 88,60 90,60 91,60 92,60 93,60 94,60 95,60 96,60 98,60 106,60 118,60 120,60 90,61.5 108.5,61.5 52,62 54,62 58,62 88,62 106,62 118,62 120,62 108.5,62.25 98,62.75 99,62.75 108.5,63 98,63.75 99,63.75 108.5,63.75 52,64 54,64 58,64 118,64 120,64 98,64.5 99,64.5 106.5,64.5 108.5,64.5 98,65.25 99,65.25 108.5,65.25 52,66 106,66 108.5,66 120,66 98,66.25 99,66.25 108.5,66.75 106.5,67.5 52,68 80,68 82,68 84,68 86,68 88,68 90,68 92,68 108,68 110,68 52,70 76,70 78,70 80,70 82,70 84,70 86,70 88,70 90,70 92,70 100,70 108,70 52,72 64,72 66,72 68,72 70,72 72,72 74,72 76,72 78,72 80,72 82,72 84,72 86,72 88,72 90,72 96,72 98,72 100,72 106,72 108,72 52,74 64,74 66,74 68,74 70,74 72,74 74,74 76,74 78,74 80,74 82,74 84,74 86,74 88,74 94,74 96,74 98,74 100,74 102,74 104,74 106,74 108,74 110,74 52,76 64,76 66,76 68,76 70,76 72,76 74,76 76,76 78,76 80,76 82,76 84,76 86,76 92,76 94,76 96,76 98,76 100,76 102,76 104,76 106,76 108,76
I_SHDN: C6.1 DD1.7 S1.1 | length 16.1
  Top Layer w0.3: DD1.7 64.875,61.875 64.554,61.554 64.554,60.327 63.75,59.523 C6.1 63.75,56.84 63.95,56.64 S1.1@73.05,56.64
ILIM: DD1.11 R6.2 | length 3.4
  Top Layer w0.3: DD1.11 71.979,62.554 72.845,62.554 73.225,62.174 73.225,61.675 73.7,61.2 R6.2@74.525,61.2
NetC2_2: C2.2 DD1.0 DD1.6 DD1.8 R3.1 R6.1
  other v1: 65.5,59 67,59 68.5,59 70,59 71.5,59 60,59.5 74.5,59.5 76,59.5 77.5,59.5 60,60.5 65.5,60.5 67,60.5 68.5,60.5 70,60.5 77.5,61 60,61.5 68,61.5 69,61.5 70,61.5 60,62.5 77.5,62.5 68.3,62.8 69.7,62.8 60,63.5 69,63.5 73.5,64 74.5,64 76,64 77.5,64 68.3,64.2 69.7,64.2 68,65.5 69,65.5 70,65.5
NetC9_2: C9.2 DD2.6 | length 5.1
  Top Layer w0.2: DD2.6 101.54,64.5 102.215,63.825 103.975,63.825 104.75,63.05 C9.2
NetC10_1: C10.1 DD2.9 | length 11.5
  Top Layer w0.2: DD2.9 101.492,66 101.592,65.9 v1(101.7,65.9)
  Top Layer w0.3: C10.1 v1(95,70.5)
  Bottom Layer w0.3: v1(95,70.5) 97.1,70.5 v1(101.7,65.9)
NetDD2_10: DD2.10 R5.2 | length 3.1
  Top Layer w0.2: DD2.10 101.842,66.5 102.225,66.117 102.342,66 R5.2@103.225,66
NetHL1_2: HL1.2 R10.1 | length 9.5
  Top Layer w0.15: v1(67,73) 67.075,72.925 67.075,69.425 R10.1
  Top Layer w0.3: v1(67.675,77.175) HL1.2
  Bottom Layer w0.3: v1(67,73) 67,76.5 v1(67.675,77.175)
NetHL2_2: HL2.2 R11.1 | length 52
  Top Layer w0.3: HL2.2 119.5,78 119.824,78 120,77.824 120,68.75 117.75,66.5 R11.1@116.275,66.5
NetR4_2: R4.2 R5.1 | length 2.2
  Top Layer w0.3: R4.2@103.225,67.5 103.225,67.475 103.5,67.2 103.6,67.2 104.775,66.025 R5.1@104.775,66
NetR8_1: R8.1 R9.2 | length 1.5
  Top Layer w0.5: R8.1@104.775,70.5 R9.2@104.775,72
OVP: DD1.5 R2.1 R3.2 | length 4.4
  Top Layer w0.3: R3.2@63.775,61.5 63.775,63.5 64.5,63.5 64.825,63.175 DD1.5
SW: C9.1 DD2.1 DD2.2 DD2.3 DD2.4 DD2.5 L1.1
U_IN: C1.1 DD1.1 DD1.2 R1.2 VD1.1 X1.3 X1.4
U_INTERIM: C3.1 C4.1 C5.1 C7.1 DD1.15 DD1.16 DD2.18 DD2.20 DD2.21 DD2.22 R10.2 VD2.1
U_OUT: C11.1 C12.2 C13.2 C14.2 C15.2 L1.2 R7.2 R11.2 X2.3 X2.4 | length 19.4
  Top Layer w0.3: C11.1 v1(101.5,71.5) ; R7.2@104.775,69 v1(106,69)
  Bottom Layer w0.3: v1(101.5,71.5) 105,71.5 107.5,69 ; v1(106,69) 107.5,69 ; v1(114.5,65) 110.5,69 107.5,69
UVLO: DD1.3 R1.1 R2.2 | length 5.2
  Top Layer w0.3: R2.2@62.225,63.5 62.225,63.525 63.175,64.475 63.8,64.475 ; R1.1@63.775,65.45 63.775,64.5 63.8,64.475 ; DD1.3 63.8,64.475
VCC: C8.1 DD2.8 | length 3.3
  Top Layer w0.2: DD2.8 101,65.5 102,64.5 C8.1
pads on no net: DD1.4 DD1.10 DD1.13 DD1.14 DD2.7 DD2.11 DD2.16 DD2.19 DD2.23

## Polygon pours and split planes (outlines as drawn)
GND on Top Layer "NONET_L-01_P-001" (solid, remove dead copper, pour order 22): 50,50 122.5,50 122.5,79 50,79
U_INTERIM on Top Layer "NONET_L-01_P-001" (solid, remove dead copper, pour order 10): 71,64.75 71,66.25 70.5,66.75 70.5,70.5 75,70.5 75,67.25 93.75,67.25 94.75,66.25 97.25,66.25 97.25,63.75 78.25,63.75 78.25,64.75
NetC2_2 on Top Layer "Top Layer-NetC2_2" (solid, pour order 4): 59,63.8 59,58.5 78,58.5 78,64.5 70.5,64.5 70.5,66 67.5,66 67.5,64.5
U_OUT on Top Layer "NONET_L-01_P-001" (solid, remove dead copper, pour order 20): 106.25,59.5 107.5,60.75 110.5,60.75 110.5,67.25 111,67.75 112.5,67.75 114.25,69.5 114.25,77.5 119.5,77.5 119.5,69 117.75,67.25 115.5,67.25 115.5,54.25 107.5,54.25 106.25,55.5
SW on Top Layer "NONET_L-01_P-001" (solid, remove dead copper, pour order 18): 99.75,64 100,64.25 101.5,64.25 102.25,63.5 104,63.5 104,61.25 105.75,59.5 105.75,55.5 105.25,55 99.75,55
U_INTERIM on Top Layer "NONET_L-01_P-001" (solid, remove dead copper, pour order 16): 81,59.5 78.25,62.25 78.25,63.75 79.75,63.75 81.525,65.525 85.475,65.525 87.5,63.5 87.5,62.25 84.75,59.5
FB on Top Layer "NONET_L-01_P-001" (solid, remove dead copper, pour order 8): 99.25,67 99,67.25 99,68 101.25,70.25 101.75,70.25 102.5,71 104,71 104,68.25 102.5,68.25 101.25,67
U_IN on Top Layer "U_IN_L01_P000" (solid, remove dead copper, pour order 0): 53,76.5 58,76.5 58,68 65.5,68 65.5,67.5 66.5,66.5 67,66.5 67,64.9 61.5,64.9 61.5,66 59,66 58.5,65.5 57,64 55,64 53,66
no net on Top Layer "NONET_L-01_P-001" (solid, remove dead copper, pour order 12): 78.75,63.25
GND on Bottom Layer "NONET_L-01_P-001" (solid, remove dead copper, pour order 32): 50,79 58,79 58,77 63,77 63,77.25 86.75,77.25 93.25,70.75 93.25,67.5 94.75,66 95.75,66 95.75,68 94.5,69.25 94.5,71.25 88.5,77.25 113.75,77.25 113.75,79 122.5,79 122.5,50 50,50
GND on Bottom Layer "NONET_L-01_P-001" (solid, pour order 30): 62.75,72.75 62.75,77.5 86.75,77.5 89.25,75 89.5,74.75 93.5,70.75 93.5,67.5 94.75,66.25 95.5,66.25 95.5,68 94.25,69.25 94.25,71.25 88,77.5 109.5,77.5 109.5,73.5 113.5,73.5 113.5,79 58.25,79 58.25,78.75 58.25,72.75
no net on Bottom Layer "NONET_L-01_P-001" (solid, remove dead copper, pour order 28): 50,79
NetC2_2 on Bottom Layer "NONET_L-01_P-001" (solid, remove dead copper, pour order 2): 59,66.5 78,66.5 78,58 59,58

## Silkscreen, mask and mechanical layers (free items; w line width, h text height)
Top Overlay:
  lines w0.254: 85.5,66 85.5,68.5 ; 89,66 89,68.5 ; 93.25,65.25 92.5,66 ; 112.125,66.375 113.5,65 ; 113.5,57.5 118.25,57.5 ; 113.5,60 118.25,60 ; 113.5,62.5 118.25,62.5 ; 92.5,66 82,66 82,68.5 92.5,68.5 92.5,66 ; 113.5,65 113.5,65 ; 113.5,65 113.5,55 118.25,55 118.25,65 113.5,65
  text "GND" at 106.75,77.5 h2
  text "PWR IN" at 70,77.25 h1.52
  text "PWR OUT" at 74.5,77.25 h1.52
  text "Vin" at 50.5,76.25 h2 r270
  text "Vout" at 122,74.25 h2 r90
  text "Buck / 12V-5V, 2A" at 84,72 h3
  text "Vin" at 50.5,71.5 h2 r270
  text "Vout" at 122,69 h2 r90
  text ".designation" at 105.25,50.5 h2
Bottom Overlay:
  text ".pcb_dec_number" at 121.25,50.5 h2
Board:
  the board outline again, w0.1
Assembly Notes (Mech5):
  text "'.title'" at 50,47.5 h2
  text "'.project'_'.pcb_dec_number'['.Pcb_File_Name_No_Path']" at 50,45 h2